# Altium PCB koosh_sd_card_base_v1_1.PcbDoc
Units mil, origin at the board's own origin, x right, y up, seen from the top; angles counter-clockwise.
Board outline 599.99 x 600 mil, 4 copper layers (Top Layer, PWR, GND, Bottom Layer 1), stack 23.778 mil thick; 21 components, 31 nets, 125 pads, 54 vias.
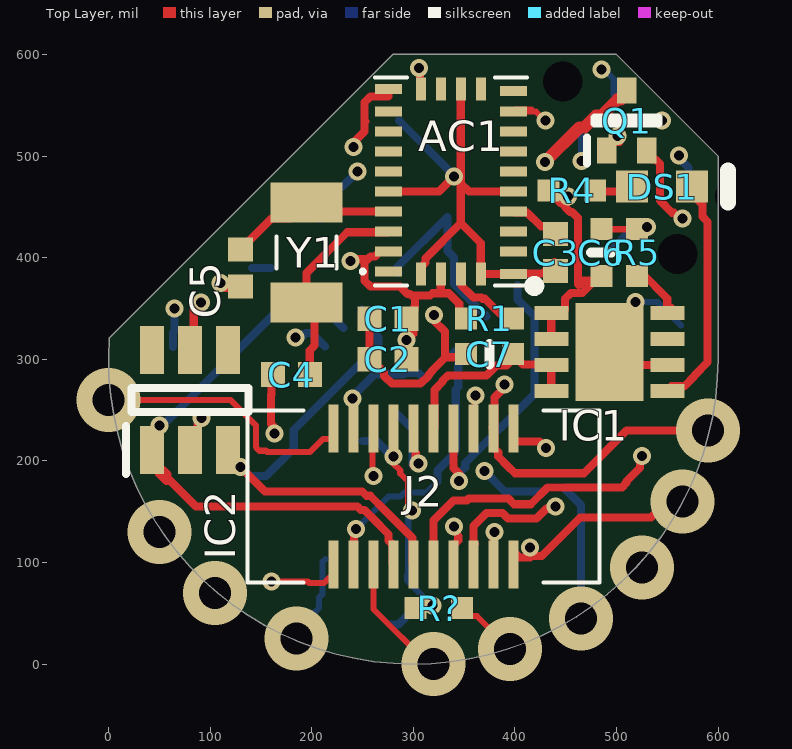
[diagram p0: Top Layer view]
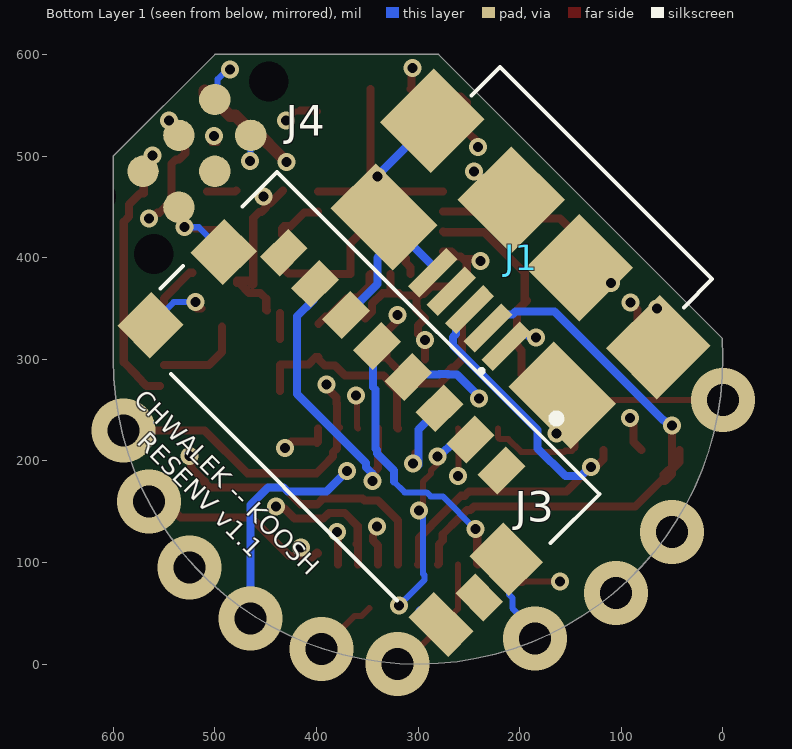
[diagram p1: Bottom Layer 1 view, seen from below]
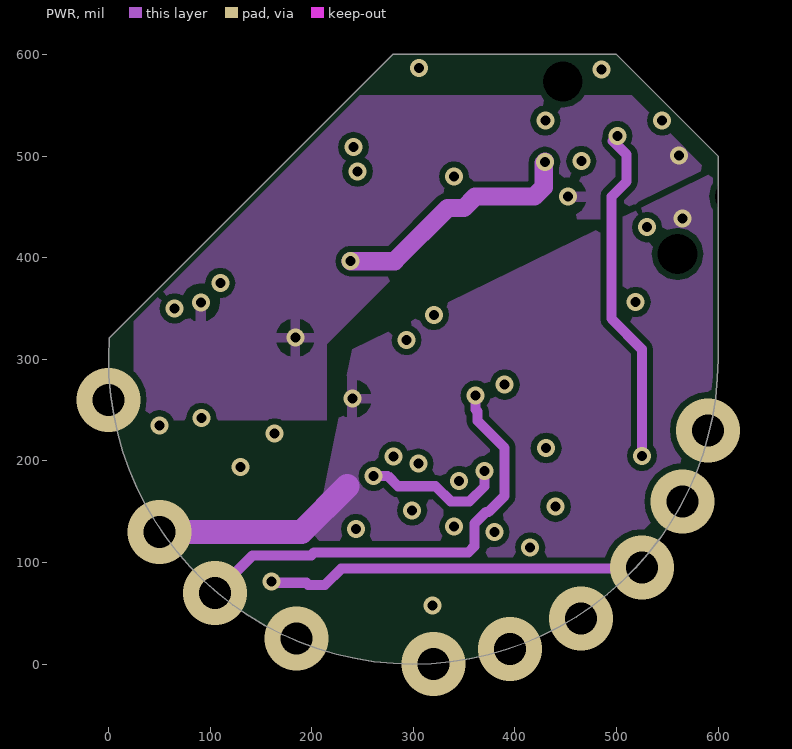
[diagram p2: PWR]
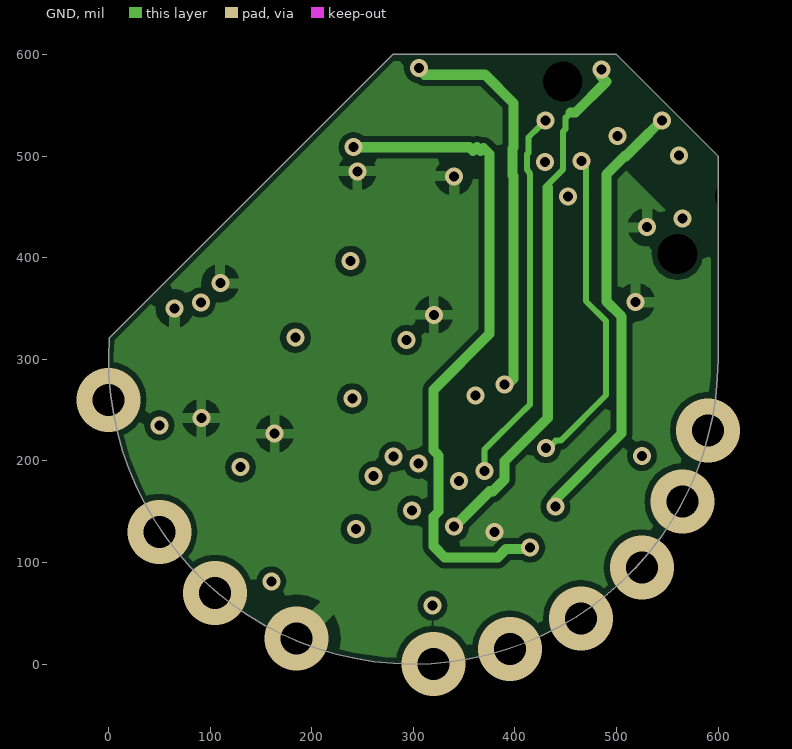
[diagram p3: GND]
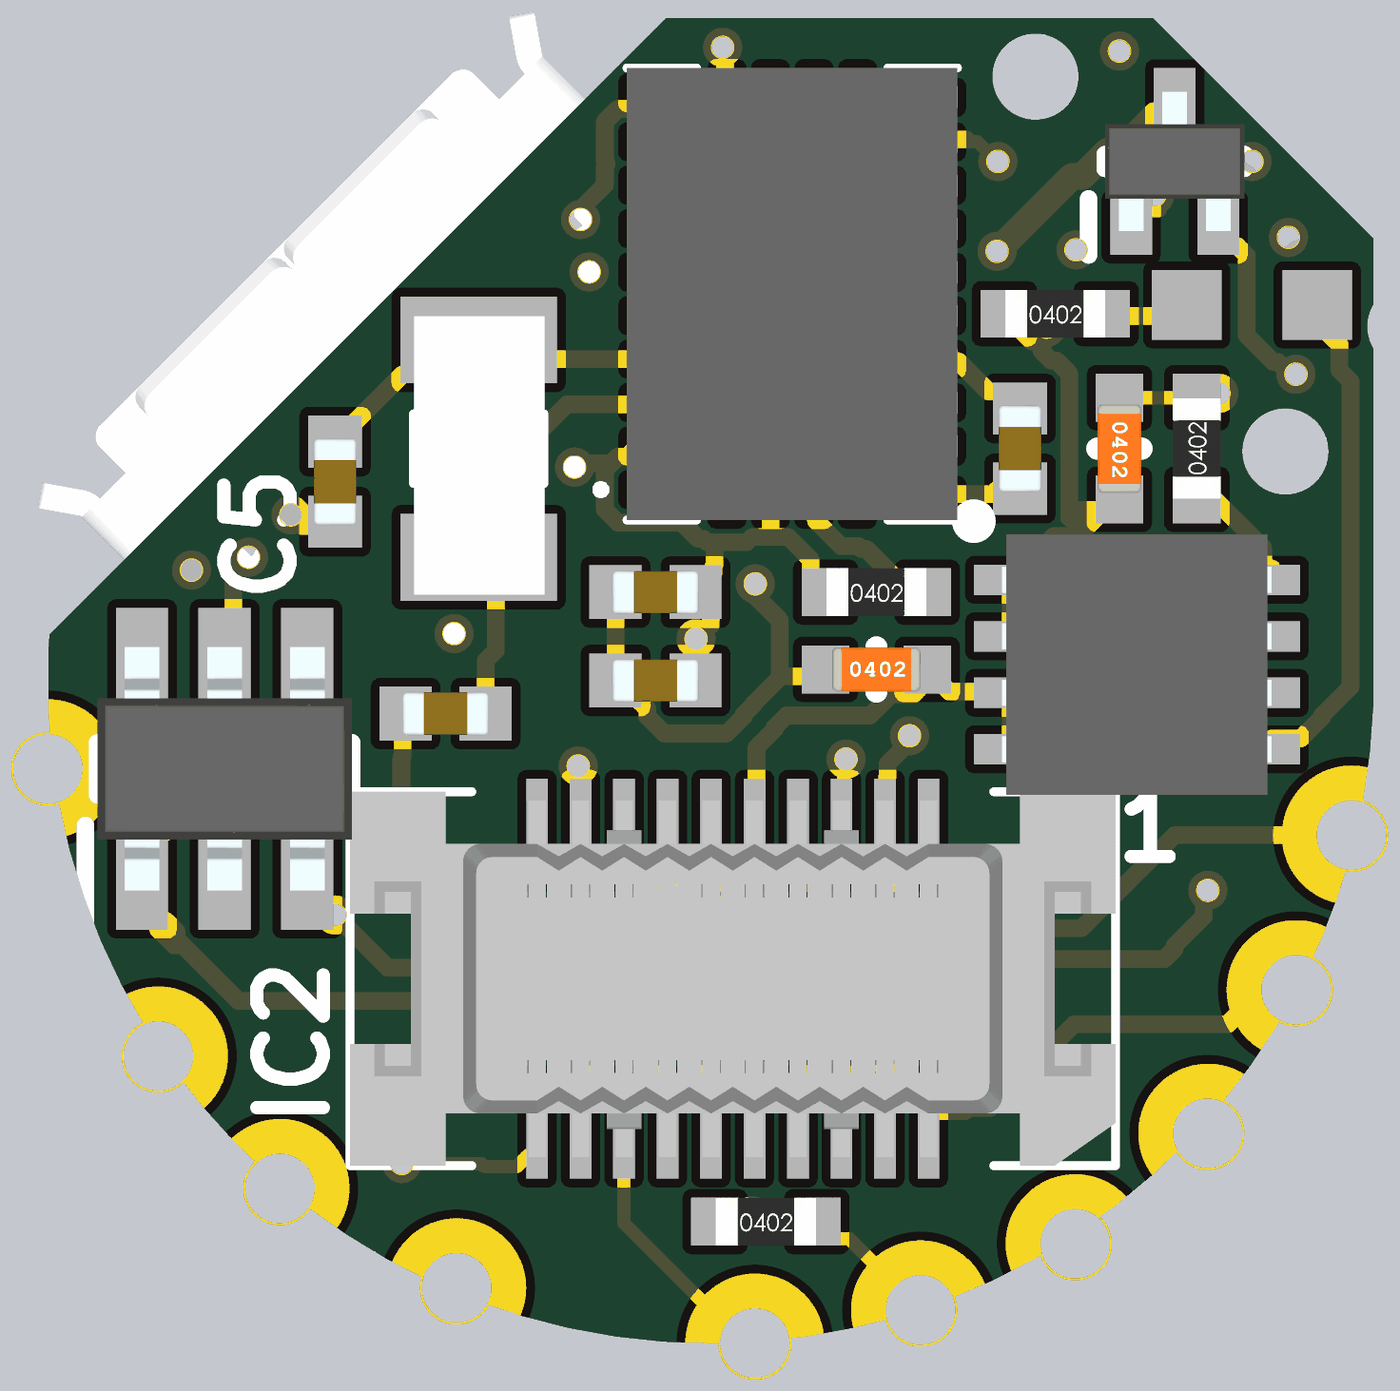
[diagram p4: 3D render of the assembled board from above, using the file's embedded part models]

## Layer stack, top to bottom
Top Solder: solder mask 0.394, Solder Resist, Dk 3.5
Top Layer: signal copper 1.417
Dielectric 2: prepreg 2.795, PP-006, Dk 4.1
PWR: signal copper 1.378
Dielectric 1: dielectric 12.598, FR-4, Dk 4.8
GND: signal copper 1.378
Dielectric 3: prepreg 2.795, PP-006, Dk 4.1
Bottom Layer 1: signal copper 1.417
Bottom Solder: solder mask 0.394, Solder Resist, Dk 3.5

## Board outline
0.73,320.93 ccw(c300,300) 600,300 600,500 500,600 279.8,600

## Design rules (kind name [scope] priority, off if disabled: settings)
BoardOutlineClearance [All] p1: gap=5 ignorepadtopadclearanceinfootprint=FALSE except(0: Arc-SplitContinuation Track-SplitContinuation SMDPad-SplitContinuation THPad-SplitContinuation Via-SplitContinuation Fill-SplitContinuation Poly-SplitContinuation Region-SplitContinuation Text-SplitContinuation)
Clearance [All] p1: gap=6 ignorepadtopadclearanceinfootprint=FALSE except(0: Arc-Hole Track-Hole SMDPad-Hole THPad-Hole Via-Hole Fill-Hole Poly-Hole Region-Hole Text-Hole)
PlaneConnect PWR [InNet('GND') or InNet('3.3V') or InNet('VBAT')] p1: planeconnectstyle=Relief reliefexpansion=20 reliefentries=4 reliefconductorwidth=10 reliefairgap=10
PlaneConnect [All] p2: planeconnectstyle=Relief reliefexpansion=20 reliefentries=4 reliefconductorwidth=10 reliefairgap=10
PolygonConnect [All] p1: connectstyle=Relief reliefconductorwidth=10 reliefentries=4 polygonreliefangle="90 Angle" airgapwidth=10
RoutingVias [All] p1: holewidth=9.84 width=17.72 viastyle="Through Hole" minholewidth=9.84 minwidth=17.72 maxholewidth=9.84 maxwidth=17.72
SolderMaskExpansion [All] p1: expansion=4 istentingtop=FALSE
Width [All] p1: maxlimit=10 minlimit=6 preferedwidth=10 toplayer_maxwidth=8 toplayer_prefwidth=6 midlayer1_minwidth=10 midlayer2_minwidth=10 bottomlayer_maxwidth=8 bottomlayer_prefwidth=6 minimp=50.000000 maximp=50.000000 favimp=50.000000
29 further rules are at their usual default settings.

## Components (designator, comment, footprint, x,y, rotation, side; value= is the part's Value field where it differs from the comment)
AC1 "BNO080" BNO080 330,475 r180 top
C1 "0.10µF" CAPC1005X55N 275,340 r180 top
C2 "0.10µF" CAPC1005X55N 275,300 r180 top
C3 "0.10µF" CAPC1005X55N 440,405 r270 top
C4 "15pF" CAPC1005X55N 180,285 r180 top
C5 "15pF" CAPC1005X55N 130,390 r270 top
C6 "4.7µF" SMD-0402C 485,405 r180 top
C7 "4.7µF" SMD-0402C 375,305 r270 top
DS1 "LTST-C190KFKT" LTST-C190KFKT_V 545,470 r0 top
IC1 "MCP73831T-2ACI_MC" SON65P300X300X100-9N-D 492.91,307.2 r0 top
IC2 "USBLC6-2SC6" SOT95P280X145-6N 80,260 r90 top
J1 "ZX62-B-5PA(33)" ZX62B5PA33 195,403.22 r45 bottom
J2 "0537480208" 0537480208 310,165 r180 top
J3 "0475710001" 0475710001 356,250 r225 bottom
J4 "TC2030-CTX-NL" TC2030MCPNL10 523.27,508.27 r315 bottom
Q1 "RE1C002ZPTL" SOTFL50P160X85-3N 510,535 r90 top
R1 "10k" SMD-0402-RES 375,340 r270 top
R4 "80.6k" SMD-0402-RES 455.95,466.05 r270 top
R5 "10k" SMD-0402-RES 520,405 r0 top
R? "0" SMD-0402-RES 325,55 r270 top
Y1 "FC-135_32.7680KA-A5" FC135327680KAAG0 195,405 r90 top

## Footprints (in the part's own frame and the unit in brackets; to place one, negate y for a bottom-side part, rotate by r counter-clockwise, add the part's x,y. Pads: shape width x height; smd on the part's side, far side on the other; paste and mask are expansions set on the pad)
0475710001 [mm]
  rect 0.7x1 smd: 1(3.55,1.415) 2(2.45,1.415) 3(1.35,1.415) 4(0.25,1.415) 5(-0.85,1.415) 6(-1.95,1.415) 7(-3.05,1.415) 8(-4.15,1.415)
  rect 1.15x1.2 smd: G1(-5.225,0.365) G2(-5.225,-2.225)
  rect 1.4x1.2 smd: G3(5.2,-0.075)
  rect 1x0.7 smd: G4(5.4,-1.225)
  rect 1.4x0.9 smd: G5(5.2,-2.375)
  silkscreen extent -5.7,-2.73 5.7,3.4, body extent -5.68,-2.53 5.72,2.92, height 2.28
0537480208 [mm]
  rect 0.25x1.2 smd: 1(-2.25,-1.7) 2(-2.25,1.7) 3(-1.75,-1.7) 4(-1.75,1.7) 5(-1.25,-1.7) 6(-1.25,1.7) 7(-0.75,-1.7) 8(-0.75,1.7) 9(-0.25,-1.7) 10(-0.25,1.7) 11(0.25,-1.7) 12(0.25,1.7) 13(0.75,-1.7) 14(0.75,1.7) 15(1.25,-1.7) 16(1.25,1.7) 17(1.75,-1.7) 18(1.75,1.7) 19(2.25,-1.7) 20(2.25,1.7)
  silkscreen extent -4.4,-2.15 4.4,2.15, body extent -4.4,-2.15 4.4,2.15, height 2.42
BNO080 [mm]
  rect 0.675x0.25 smd: 1(1.387,2.25) 6(-1.738,2.313) 7(-1.738,1.75) 8(-1.738,1.25) 9(-1.738,0.75) 10(-1.738,0.25) 11(-1.738,-0.25) 12(-1.738,-0.75) 13(-1.738,-1.25) 14(-1.738,-1.75) 15(-1.738,-2.263) 20(1.387,-2.313) 21(1.387,-1.75) 22(1.387,-1.25) 23(1.387,-0.75) 24(1.387,-0.25) 25(1.387,0.25) 26(1.387,0.75) 27(1.387,1.25) 28(1.387,1.75)
  rect 0.25x0.575 smd: 2(0.575,2.313) 3(0.075,2.313) 4(-0.425,2.313) 5(-0.925,2.313) 16(-0.925,-2.313) 17(-0.425,-2.313) 18(0.075,-2.313) 19(0.575,-2.313)
  silkscreen extent -2.07,-2.6 2.07,2.6, body extent -2.07,-2.6 1.73,2.6, height 1.28
CAPC1005X55N [mm]
  rect 0.6x0.62 smd: 1(-0.46,0) 2(0.46,0)
  body extent -0.5,-0.25 0.5,0.25, height 0.55
FC135327680KAAG0 [mm]
  rect 1x1.8 smd: 1(-1.25,0) 2(1.25,0)
  silkscreen extent -0.4,-0.75 0.4,0.75, body extent -1.68,-0.76 1.52,0.74, height 0.9
LTST-C190KFKT_V [mm] "SMD, 2-Leads, Body 1.6x0.8mm"
  rect 0.8x0.8 smd: 1(-0.75,0) 2(0.75,0)
  silkscreen extent 1.65,-0.4 1.65,0.4, body extent -0.8,-0.4 0.8,0.4, height 0.9
SMD-0402-RES [mm]
  rect 0.55x0.55 smd: 1(0,0.584) 2(0,-0.584)
  body extent -0.28,-0.57 0.27,0.58, height 0.41
SMD-0402C [mm]
  rect 0.55x0.55 smd: 1(0,0.584) 2(0,-0.584)
  silkscreen extent -0.25,0 0.25,0, body extent -0.25,-0.51 0.25,0.51, height 0.51
SON65P300X300X100-9N-D [mm]
  rect 0.85x0.35 smd: 1(-1.45,0.975) 2(-1.45,0.325) 3(-1.45,-0.325) 4(-1.45,-0.975) 5(1.45,-0.975) 6(1.45,-0.325) 7(1.45,0.325) 8(1.45,0.975)
  rect 1.7x2.45 smd: 9(0,0)
  silkscreen extent -2,1.53 -1.75,1.77, body extent -1.55,-1.5 1.55,1.5, height 1
SOT95P280X145-6N [mm]
  rect 1.2x0.6 smd: 1(-1.25,0.95) 2(-1.25,0) 3(-1.25,-0.95) 4(1.25,-0.95) 5(1.25,0) 6(1.25,0.95)
  silkscreen extent -1.85,-1.46 0.3,1.6, body extent -1.4,-1.46 1.4,1.46, height 1.45
SOTFL50P160X85-3N [mm]
  rect 0.645x0.48 smd: 1(-0.752,0.5) 2(-0.752,-0.5) 3(0.752,0)
  silkscreen extent -1.07,-0.8 0.08,0.99, body extent -0.8,-0.8 0.8,0.8, height 0.85
TC2030MCPNL10 [mm]
  round 0.787 smd: 1(-1.27,-0.434) 2(-1.27,0.836) 3(0,-0.434) 4(0,0.836) 5(1.27,-0.434) 6(1.27,0.836)
  round 0.495 hole 0.991 unplated: 7(-2.54,0.201) 8(2.54,1.217) 9(2.54,-0.815)
ZX62B5PA33 [mm]
  rect 0.4x1.35 smd: 1(-1.3,1.95) 2(-0.65,1.95) 3(0,1.95) 4(0.65,1.95) 5(1.3,1.95)
  rect 2.2x1.6 smd: 6(-3.15,1.825) 7(3.15,1.825)
  rect 1.8x1.9 smd: 8(-4,-0.725) 11(4,-0.725)
  rect 1.9x1.9 smd: 9(-1.2,-0.725) 10(1.2,-0.725)
  silkscreen extent -3.75,-2.88 3.75,2.87, body extent -4.04,-3.3 4.04,2.3, height 2.78

## Part data
AC1: "Accelerometer", Manufacturer_Name="Hillcrest Laboratories", Datasheet Link=http://www.hillcrestlabs.com/download/5a05f340566d07c196001ec1, Height=1.18mm, Manufacturer_Part_Number=BNO080
C1 C2 C3: library part GCM155R71C104KA55D, "CAP CER 0.1UF 16V X7R 0402", Digi-Key Part Number=490-4759-1-ND, Manufacturer="Murata Electronics North America", Operating Temperature="-55°C ~ 125°C", Package / Case="0402 (1005 Metric)", Ratings=AEC-Q200, Temperature Coefficient=X7R, Tolerance=±10%, Voltage=16V, @ qty=0, Applications=Automotive, Datasheets=http://www.murata.com/~/media/webrenewal/support/library/catalog/products/capacitor/mlcc/c03e.ashx, Factory Stock=0, Features=-, Height - Seated (Max)=-, Image=//media.digikey.com/Renders/Murata%20Renders/ZRB-SERIES-0402.jpg, Lead Spacing=-, Lead Style=-, Minimum Quantity=1, Mounting Type="Surface Mount, MLCC", Packaging="Cut Tape (CT)", Part Number=GCM155R71C104KA55D, Part Status=Active, Quantity Available=734194, Series=GCM, Size / Dimension="0.039\" L x 0.020\" W (1.00mm x 0.50mm)", Thickness (Max)="0.022\" (0.55mm)", Unit Price (USD)=0.1
C4 C5: library part GCM1555C1H150JA16D, "CAP CER 15PF 50V NP0 0402", Digi-Key Part Number=490-11147-1-ND, Manufacturer="Murata Electronics North America", Operating Temperature="-55°C ~ 125°C", Package / Case="0402 (1005 Metric)", Ratings=AEC-Q200, Temperature Coefficient="C0G, NP0", Tolerance=±5%, Voltage=50V, @ qty=0, Applications=Automotive, Datasheets=http://www.murata.com/~/media/webrenewal/support/library/catalog/products/capacitor/mlcc/c03e.ashx, Factory Stock=0, Features=-, Height - Seated (Max)=-, Image=//media.digikey.com/Renders/Murata%20Renders/ZRB-SERIES-0402.jpg, Lead Spacing=-, Lead Style=-, Minimum Quantity=1, Mounting Type="Surface Mount, MLCC", Packaging="Cut Tape (CT)", Part Number=GCM1555C1H150JA16D, Part Status=Active, Quantity Available=6185, Series=GCM, Size / Dimension="0.039\" L x 0.020\" W (1.00mm x 0.50mm)", Thickness (Max)="0.022\" (0.55mm)", Unit Price (USD)=0.1
C6 C7: library part GRM153R60G475ME15D, "CAP CER 4.7UF 4V X5R 0402", Digi-Key Part Number=490-13231-1-ND, Manufacturer="Murata Electronics North America", Operating Temperature="-55°C ~ 85°C", Package / Case="0402 (1005 Metric)", Ratings=-, Temperature Coefficient=X5R, Tolerance=±20%, Voltage=4V, @ qty=0, Applications="General Purpose", Datasheets=http://psearch.en.murata.com/capacitor/product/GRM153R60G475ME15%23.pdf, Factory Stock=0, Features=-, Height - Seated (Max)=-, Image=//media.digikey.com/Renders/Murata%20Renders/ZRB-SERIES-0402.jpg, Lead Spacing=-, Lead Style=-, Minimum Quantity=1, Mounting Type="Surface Mount, MLCC", Packaging="Cut Tape (CT)", Part Number=GRM153R60G475ME15D, Part Status=Active, Quantity Available=9100, Series=GRM, Size / Dimension="0.039\" L x 0.020\" W (1.00mm x 0.50mm)", Thickness (Max)="0.013\" (0.33mm)", Unit Price (USD)=0.27
DS1: library part CMP-1674-00008-1, "LED Uni-Color Orange, 75 mW, 30 mA, -35 to 85 degC, 2-Pin SMD, RoHS, Tape and Reel", Case Code (Imperial)=0603, Case Code (Metric)=1608, Max Operating Temperature="155 degC", Min Operating Temperature="-55 degC", Package Quantity=5000, Power Rating="100 mW", Resistance="47 kohm", Tolerance=1%, Voltage Rating="50 V", Case\Package=0603, ComponentLink1Description="Manufacturer URL", ComponentLink1URL=http://www.us.liteon.com/, ComponentLink2Description=Datasheet, ComponentLink2URL=http://optoelectronics.liteon.com/upload/download/DS-22-99-0186/S_110_LTST-C190KFKT.pdf, DatasheetVersion="Rev. I, 09/2011", Height="0.45 mm", Length="1.6 mm", Mount="Surface Mount", PackageDescription="2-Pin Surface Mount Device, Body 1.6 x 0.8 mm", PackageReference=C190KFKT, Packaging="Tape and Reel", Pins=2, REACH SVHC="No SVHC", RoHSCompliant=true, Voltage Rating (DC)="50 V", Width="0.8 mm"
IC1: "Integrated Circuit", Manufacturer_Name=Microchip, Manufacturer_Part_Number=MCP73831T-2ACI/MC, Mouser Part Number=579-MCP73831T-2ACIMC, Allied Price/Stock=https://www.alliedelec.com/microchiptechnologyinc-mcp73831t-2aci-mc/70452042/, Allied_Number=70452042, Datasheet Link=http://ww1.microchip.com/downloads/en/DeviceDoc/20001984g.pdf, Height=1mm, Mouser Price/Stock=https://www.mouser.com/Search/Refine.aspx?Keyword=579-MCP73831T-2ACIMC
IC2: "Integrated Circuit", Manufacturer_Name=STMicroelectronics, Mouser Part Number=511-USBLC6-2SC6, RS Part Number=9206266, Allied Price/Stock=http://www.alliedelec.com/stmicroelectronics-usblc6-2sc6/70389689/, Allied_Number=70389689, Datasheet Link=http://www.st.com/st-web-ui/static/active/en/resource/technical/document/datasheet/CD00050750.pdf, Height=1.45mm, Manufacturer_Part_Number=USBLC6-2SC6, Mouser Price/Stock=https://www.mouser.com/Search/Refine.aspx?Keyword=511-USBLC6-2SC6, RS Price/Stock=https://uk.rs-online.com/web/p/products/9206266
J1: "Connector", Manufacturer_Name=Hirose, Mouser Part Number=798-ZX62-B-5PA33, RS Part Number=1362267, Datasheet Link=http://www.mouser.com/ds/2/185/ZX_catalog-939768.pdf, Height=2.8mm, Manufacturer_Part_Number=ZX62-B-5PA(33), Mouser Price/Stock=https://www.mouser.com/Search/Refine.aspx?Keyword=798-ZX62-B-5PA33, RS Price/Stock=http://uk.rs-online.com/web/p/products/1362267
J2: "Connector", Manufacturer_Name=Molex, Datasheet Link=https://www.molex.com/pdm_docs/sd/537480208_sd.pdf, Height=2.6mm, Manufacturer_Part_Number=0537480208
J3: "Connector", Manufacturer_Name=Molex, Mouser Part Number=N/A, Datasheet Link=https://www.molex.com/pdm_docs/sd/475710001_sd.pdf, Height=2.3mm, Manufacturer_Part_Number=0475710001, Mouser Price/Stock=https://www.mouser.com/Search/Refine.aspx?Keyword=N%2FA
J4: "Connector", Manufacturer_Name="Tag Connect", Datasheet Link=http://www.tag-connect.com/Materials/TC2030-CTX.pdf, Height=18mm, Manufacturer_Part_Number=TC2030-CTX-NL
Q1: "MOSFET (P-Channel)", Manufacturer_Name="ROHM Semiconductor", Mouser Part Number=755-RE1C002ZPTL, RS Part Number=1486960P, Datasheet Link=https://componentsearchengine.com/Datasheets/1/RE1C002ZPTL.pdf, Height=0.85mm, Manufacturer_Part_Number=RE1C002ZPTL, Mouser Price/Stock=https://www.mouser.com/Search/Refine.aspx?Keyword=755-RE1C002ZPTL, RS Price/Stock=http://uk.rs-online.com/web/p/products/1486960P
R1 R5: library part ERJ-2GEJ103X, "RES SMD 10K OHM 5% 1/10W 0402", Digi-Key Part Number=P10KJCT-ND, Manufacturer="Panasonic Electronic Components", Operating Temperature="-55°C ~ 155°C", Package / Case="0402 (1005 Metric)", Power (Watts)="0.1W, 1/10W", Supplier Device Package=0402, Temperature Coefficient=±200ppm/°C, Tolerance=±5%, @ qty=1500, Composition="Thick Film", Datasheets=http://industrial.panasonic.com/www-cgi/jvcr13pz.cgi?E+PZ+3+AOA0001+ERJ2GEJ103X+7+WW, Factory Stock=0, Failure Rate=-, Features="Automotive AEC-Q200", Height - Seated (Max)="0.016\" (0.40mm)", Image=//media.digikey.com/Photos/Panasonic%20Photos/ERJ-PA2-Series.jpg, Minimum Quantity=1, Number of Terminations=2, Packaging="Cut Tape (CT)", Part Number=ERJ-2GEJ103X, Part Status=Active, Quantity Available=2560215, Series=ERJ, Size / Dimension="0.039\" L x 0.020\" W (1.00mm x 0.50mm)", Unit Price (USD)=0.00350
R4: library part ERJ-2RKF8062X, "RES SMD 80.6K OHM 1% 1/10W 0402", Digi-Key Part Number=P80.6KLCT-ND, Manufacturer="Panasonic Electronic Components", Operating Temperature="-55°C ~ 155°C", Package / Case="0402 (1005 Metric)", Power (Watts)="0.1W, 1/10W", Supplier Device Package=0402, Temperature Coefficient=±100ppm/°C, Tolerance=±1%, @ qty=1500, Composition="Thick Film", Datasheets=http://industrial.panasonic.com/www-cgi/jvcr13pz.cgi?E+PZ+3+AOA0002+ERJ2RKF8062X+7+WW, Factory Stock=0, Failure Rate=-, Features="Automotive AEC-Q200", Height - Seated (Max)="0.016\" (0.40mm)", Image=//media.digikey.com/Photos/Panasonic%20Photos/ERJ-PA2-Series.jpg, Minimum Quantity=1, Number of Terminations=2, Packaging="Cut Tape (CT)", Part Number=ERJ-2RKF8062X, Part Status=Active, Quantity Available=91747, Series=ERJ, Size / Dimension="0.039\" L x 0.020\" W (1.00mm x 0.50mm)", Unit Price (USD)=0.00496
R?: library part ERJ-2RKF1003X, "RES SMD 0 OHM 1% 1/10W 0402", Digi-Key Part Number=P100KLCT-ND, Manufacturer="Panasonic Electronic Components", Operating Temperature="-55°C ~ 155°C", Package / Case="0402 (1005 Metric)", Power (Watts)="0.1W, 1/10W", Supplier Device Package=0402, Temperature Coefficient=±100ppm/°C, Tolerance=±1%, @ qty=1500, Composition="Thick Film", Datasheets=http://industrial.panasonic.com/www-cgi/jvcr13pz.cgi?E+PZ+3+AOA0002+ERJ2RKF1003X+7+WW, Factory Stock=0, Failure Rate=-, Features="Automotive AEC-Q200", Height - Seated (Max)="0.016\" (0.40mm)", Image=//media.digikey.com/Photos/Panasonic%20Photos/ERJ-PA2-Series.jpg, Minimum Quantity=1, Number of Terminations=2, Packaging="Cut Tape (CT)", Part Number=ERJ-2RKF1003X, Part Status=Active, Quantity Available=2645965, Series=ERJ, Size / Dimension="0.039\" L x 0.020\" W (1.00mm x 0.50mm)", Unit Price (USD)=0.00496
Y1: library part FC-135_32.7680KA-A3, "Crystal or Oscillator", Manufacturer_Name="Epson Timing", Manufacturer_Part_Number="FC-135 32.7680KA-A5", Mouser Part Number=732-FC135-32.76KAA3, Datasheet Link=https://support.epson.biz/td/api/doc_check.php?dl=brief_fc-135r_en.pdf, Height=0mm, Mouser Price/Stock=https://www.mouser.com/Search/Refine.aspx?Keyword=732-FC135-32.76KAA3

## Via types
v1: diameter 17.72, hole 9.84, Top Layer to Bottom Layer 1, tented both sides, 44 vias
v2: diameter 62.99, hole 31.5, Top Layer to Bottom Layer 1, 10 vias

## Nets (pads, with @x,y where several pads share a name; then routed paths per layer and width w, separated by ;. In a path a pad name is that pad's centre, name@x,y a point inside that pad or via, vN(x,y) a via of type N, cw(c..) or ccw(c..) an arc to the next point about the centre after c; other vN are vias at no path point)
3.3V: J2.17 J3.4 Q1.2 | length 378.2
  Top Layer w8: Q1.2@529.09,505.99 529.09,502.74 535.13,496.7 538.38,496.7 542.64,492.44 542.64,456.25 554.64,444.25 556.66,444.25 562.25,438.67 v1(564.87,438.67)
  PWR w10: v1@237.42,260.64 238.08,261.3 v1(240.04,261.3)
  PWR w24: v2(50,130) 190,130 235,175
  Bottom Layer 1 w8: v1(240.04,261.3) 240.04,263.46 261.74,285.16 270.39,285.16 270.71,285.47 278.99,285.47 279.31,285.16 290.19,285.16 291.64,286.61 305,286.61 J3.4@310.62,280.98
3.3V_IMU: AC1.3 AC1.28 C1.1 C2.1 Q1.3 R1.2 | length 626.5
  Top Layer w8: v1(238.38,396.62) 240.16,398.41 255.04,398.41 ; AC1.28 267.03,406.1 262.26,401.34 257.96,401.34 255.04,398.41 ; C2.1 293.11,318.64 v1(293.36,318.9) ; 300,325 300,333.11 C1.1 293.11,340.39 301.32,348.6 301.32,351.95 301.71,352.34 301.71,362.62 ; AC1.3 327.05,364.95 ; R1.2 345.17,346.83 345.17,354.83 335.05,364.95 327.05,364.95 ; 255.04,398.41 252.11,395.48 252.11,377.35 257.96,371.5 287.01,371.5 294.36,364.15 296.77,364.15 298.3,362.62 301.71,362.62 ; 301.71,362.62 316.43,362.62 318.76,364.95 327.05,364.95
  Top Layer w12: v1(429.62,494.33) 463.54,528.24 468.24,528.24 479.8,539.8 485.2,539.8 501.3,555.91 504.55,555.91 510,561.36 Q1.3
  PWR w18: v1(238.38,396.62) 281.62,396.62 333.93,448.93 349.79,448.93 361,460.14 419.08,460.14 428.28,469.35 428.28,492.99 v1(429.62,494.33)
  Bottom Layer 1 w8: v1(238.38,396.62) v1@240,395
5V: C6.1 IC1.1 IC1.2 IC2.5 J1.1 J4.5 R4.2 | length 310.5
  Top Layer w8: IC2.5 83.86,313.07 83.86,348.86 v1(90.82,355.82) ; R4.2 445.57,453.43 ; IC1.2 IC1.1 ; IC1.1@448.75,347.9 449.45,348.6 449.45,359.58 455.31,365.43 466.28,365.43 476.02,375.17 478.17,375.17 478.17,377.33 467.05,377.33 462.91,373.19 ; v1(452.14,460) 450.28,458.14 450.28,449.89 449.7,449.3 454.08,444.92 456.35,444.92 462.2,439.06 462.2,373.89
  Bottom Layer 1 w8: v1(183.85,321.24) 185.71,323.1 191.53,323.1 194.39,325.97 199.87,325.97 J1.1 ; v1(561.5,500.61) 561.5,497.98 570.71,488.77 J4.5
BOOT0: J4.4
GND: AC1.2 AC1.5 AC1.6 AC1.10 AC1.17 AC1.25 C1.2 C2.2 C3.2 C4.2 C5.2 C6.2 C7.2 IC1.6 IC1.9 IC2.2 J1.5 J1.6 J1.7 J1.8 J1.9 J1.10 J1.11 J2.4 J3.6 J3.G1 J3.G2 J3.G3 J4.6 R5.1 | length 1532.6
  Top Layer w6: C6.2 R5.1
  Top Layer w8: IC2.2 87.81,218.6 87.81,235.97 91.36,239.51 v1(91.36,242.14) ; v1(110,375) 115,370 130,370 C5.2 ; C4.2 160.48,283.59 160.48,265.48 160,265 160,236.36 161.66,234.69 161.66,228.67 v1(163.52,226.81) ; C1.2 C2.2 256.89,299.61 264.7,291.8 266.61,291.8 271.3,287.11 271.3,283.65 278.95,276 307.27,276 314.92,283.65 314.92,284.72 319.56,289.36 319.56,289.71 331.85,302 ; AC1.25 325.16,465.16 v1(340,480) v1@345,485 ; AC1.2 307.36,390.33 312.13,395.1 312.13,399.4 346.73,434 ; v1(320.18,343.76) 320.18,338.37 331.17,327.37 331.17,302.67 331.85,302 ; AC1.17 346.73,473.27 ; C7.2@352,302 331.85,302 ; J2.4 378.82,98.15 378.82,128.82 v1(380,130) ; AC1.10 354.84,465.16 346.73,473.27 ; C3.2@438.92,395.81 427.41,384.3 398.79,384.3 AC1.6 AC1.5 366.42,414.32 346.73,434 ; IC1.9@492.91,332.09 IC1.9 505.71,294.41 IC1.6 ; IC1.9@513.43,350 517.48,350 518.91,351.43 v1(518.91,356.32) ; 346.73,434 346.73,473.27
  Bottom Layer 1 w6: v2@185,35.66 187.58,35.66 207.11,55.19 207.11,65.12 210.54,68.55 210.54,100.37 J3.G3 ; J3.G1 515.68,430 v1(530,430) ; v1(518.91,356.32) 540.6,356.32 J3.G2
  Bottom Layer 1 w8: J1.8 63.46,326.54 65,328.08 v1(65,350) ; J1.9 J1.9@160,390 ; J1.10@208.22,438.22 J1.10 216.81,456.81 v1(245,485) ; J1.5 284.74,385.87 284.74,391.35 J1.7 333.5,406.5 340,400 340,374.1 J3.6@371.87,342.23 ; J1.11 340,480.93 v1(340,480)
  other v2: 185,25
I2C1_SCL: AC1.19 J2.3 | length 712.3
  Top Layer w8: v1(305.39,586.67) 306.44,585.62 306.44,566.98 AC1.19 ; v1(390,275) 390,272.37 380.09,262.46 380.09,256.59 379.82,256.31 379.82,234.49 378.08,232.75 379.82,231.01 379.82,212.31 383.66,208.46 383.66,204.16 392.8,195.02 399.98,187.86 453.61,187.86 467.86,187.86 510,230 v2@579.23,230
  PWR w10: v1@388.52,273.52 v1(390,275)
  GND w10: v1(305.39,586.67) 305.39,585.86 311.25,580 370.7,580 398.6,552.1 398.6,508.36 397.76,507.52 397.76,481.13 398.6,480.29 398.6,280.86 396.6,278.86 395.95,278.86 392.09,275 v1(390,275)
  other v2: 590,230
I2C1_SDA: AC1.20 J2.2 | length 930.1
  Top Layer w8: v1(241.1,508.72) v1@245.74,508.72 ; v1@241.1,513.36 252.11,524.37 252.11,533.28 252.89,534.06 252.11,534.83 252.11,552.96 257.96,558.82 275.39,558.82 AC1.20 ; J2.2@398.58,109.08 399.5,110 404.5,105 415,105 v1@416.48,106.48 ; v1(415,114.86) 416.48,113.38 v1@416.48,106.48 ; v2@553.35,160 549.58,160 533.88,144.31 464.31,144.31 426.48,106.48 v1@416.48,106.48
  GND w10: v1(241.1,508.72) 355.15,508.72 358.86,505 362.58,508.72 366.3,505 369.14,507.85 375,501.99 375,325 320,270 320,210.3 324.86,205.44 324.86,150.14 320,145.28 320,115.86 330.86,105 383.08,105 391.47,113.38 413.52,113.38 v1(415,114.86)
  other v2: 565,160
IMU_CLK_IN: AC1.27 C4.1 Y1.1 | length 205.3
  Top Layer w8: Y1.1@192.79,357.79 202.71,347.86 202.71,313.43 198.11,308.83 C4.1 ; Y1.1 195,385 235,425 274.61,425 AC1.27
IMU_CLK_OUT: AC1.26 C5.1 Y1.2 | length 179.1
  Top Layer w8: C5.1 130.39,408.11 138.2,415.92 138.2,416.31 160.42,438.53 179.31,438.53 Y1.2@186.26,445.47 ; Y1.2@180.66,445.47 Y1.2@186.26,445.47 ; Y1.2 Y1.2@186.26,445.47 ; AC1.26 Y1.2@186.26,445.47
IMU_EN: J2.10 Q1.1 | length 641.8
  Top Layer w6: v1(500.98,519.73) 500.98,516.5 497.24,512.76 v1@503.28,512.76
  Top Layer w8: J2.10 319.84,141.51 339.47,161.14 352.81,161.14 354.53,162.86 393.61,162.86 399.16,157.31 415.64,157.31 432.19,173.86 505.31,173.86 510,178.54 510,180 523.25,193.25 523.25,203.25 v1(525,205)
  PWR w10: v1(500.98,519.73) 496.26,515 510,501.26 510,475 495,460 495,340 525,310 v1(525,205)
IMU_INT: AC1.14 J2.15 | length 824.3
  Top Layer w6: J2.15 260,231.14 260,186.14 v1(260.92,185.23) ; 416.18,545.82 400.35,545.82 AC1.14 420.71,543.9 429.61,535 v1(430,535)
  PWR w10: v1(260.92,185.23) 274.77,185.23 285,175 321.92,175 336.77,160.14 355.29,160.14 370,174.85 v1(370,190)
  GND w6: v1(370,190) 370,211.02 408.98,250 409.23,250 415,255.77 415,482.74 413.28,484.46 413.28,485.41 411.76,486.93 411.76,501.72 413.28,503.24 413.28,518.3 425,530.01 v1@425,538.38
  Bottom Layer 1 w8: v1(370,190) 390,170 428.28,170 432.14,173.86 447.81,173.86 465,156.67 465,60.37 v2@464.93,60.3
  other v2: 465,45
LH_EN: R?.1 | length 58.4
  Top Layer w6: R?.1 355.69,47.31 362.69,47.31 382.54,27.46 v2@395,27.46
  other v2: 395,15
LH_HP_OUT: J2.20 | length 433
  Top Layer w6: v1(160.2,81.31) 196.17,81.31 197.48,80 212.27,80 J2.20@217.34,85.07
  PWR w10: v1(160.2,81.31) 161.51,80 194.65,80 196.65,78 213.1,78 229.1,94 500.52,94 501.52,95 v2(525,95)
MIC_EN: J2.16 | length 125.5
  Top Layer w6: J2.16 260.79,54.21 315,0 v2(320,0)
MIC_ENV: J2.5 | length 483
  Top Layer w6: J2.5 360.22,232.94 360.22,263.39 v1(361.24,264.4)
  PWR w10: v2(105,70) 142,107 199.53,107 202.53,110 354.28,110 360.14,115.86 360.14,138.23 371.77,149.86 374.14,149.86 389.86,165.57 389.86,212.72 363.34,239.23 363.34,248.35 361.24,250.46 v1(361.24,264.4)
  Bottom Layer 1 w6: v1@360,265 360.63,265 v1(361.24,264.4)
NetAC1_4: AC1.4 R1.1 | length 77.8
  Top Layer w8: AC1.4 347.65,383.02 347.65,372.32 357.35,362.62 359.15,360.83 366.97,360.83 368.22,359.58 370.42,359.58 388.17,341.83 391.17,341.83 R1.1@398,335
NetAC1_9: AC1.9 C3.1 | length 48.7
  Top Layer w8: AC1.9 399.35,444.55 412.01,444.55 425.64,430.92 431.8,430.92 433.99,428.73 C3.1@433.99,422.57
NetDS1_1: DS1.1 R4.1 | length 29.4
  Top Layer w8: R4.1 480,465 DS1.1@507.88,465
NetDS1_2: DS1.2 IC1.5 | length 233.2
  Top Layer w8: IC1.5@554.17,273.82 567.17,273.82 576.73,283.38 576.73,284.2 589.61,297.08 589.61,435.39 584.56,440.44 584.56,452.2 573.52,463.25 570,463.25 DS1.2@570,474.53
NetIC1_8: IC1.8 R5.2 | length 50.5
  Top Layer w8: R5.2@521.83,385.17 524.83,385.17 550,360 550,353.48 552.89,350.59 IC1.8@554.17,350.59
NRST: J2.1 J4.2 | length 395.6
  Top Layer w8: J2.1 398.58,218.79 399.5,217.87 400.56,218.92 424.49,218.92 v1(430.75,212.66)
  GND w6: v1(430.75,212.66) 432.83,212.66 440.17,220 445,220 489.86,264.86 489.86,337.49 470,357.35 470,490.34 v1(465.34,495)
  Bottom Layer 1 w6: J4.2 464.99,520.01 464.99,495.94 v1@465.93,495
SD_CS: J2.13 J3.2 R?.2 | length 195.4
  Top Layer w6: v1(280.64,204.2) 280.64,200.64 280,200 280,197.77 287.14,190.63 287.14,187.6 295,179.74 295,155 v1(298.93,151.07)
  Bottom Layer 1 w6: v1@295,143.97 295,88.95 293.74,87.69 293.74,82.72 v1(318.88,57.58)
  Bottom Layer 1 w8: J3.2@250.26,219.74 263.68,219.74 279.22,204.2 v1(280.64,204.2)
SPI1_MISO: J2.7 J3.7 | length 285.4
  Top Layer w8: J2.7 339.53,193.1 345.91,186.72 345,185.8 v1(345,180)
  Bottom Layer 1 w8: v1(345,180) 345,187.63 346.72,189.35 351.14,193.77 351.14,197.81 419.12,265.79 419.12,342.39 402.49,359.02 J3.7@402.49,372.85
SPI1_MOSI: J2.11 J3.3 | length 82.3
  Top Layer w8: v1@300.14,195.46 302.38,197.69 302.38,207.62
  Bottom Layer 1 w8: J3.3@280,250.36 299.5,230.86 299.5,196.1 300.6,195 302.82,197.22 v1(305,197.22)
SPI1_SCK: J2.18 J3.5 | length 275.7
  Top Layer w8: J2.18 241.75,98.72 241.75,135.11 243.58,133.28 v1(243.58,132.89)
  Bottom Layer 1 w6: v1(243.58,132.89) 275.69,165 287.6,165 291.53,168.93 313.06,168.93 323.86,179.73
  Bottom Layer 1 w8: 323.86,179.73 323.86,190.53 340.57,207.24 340.57,210.73 341.84,212.01 341.84,270.22 ; J3.5@341.25,307.92 339.84,306.51 344.45,301.9 344.45,295.05 344.29,294.89 344.29,272.67
SYS_SWCLK: J2.8 J4.1 | length 585.2
  Top Layer w8: J2.8 339.53,116.77 344.29,121.54 344.29,125.84
  GND w6: 432.28,468.9 432.28,471.73 447.48,486.93 447.48,501.72 447.48,524.4 449.86,526.77 449.86,537.71 455.03,542.88
  GND w10: v1(340.28,135.28) 375.14,170.14 378.23,170.14 389.86,181.77 389.86,199.86 432.28,242.28 432.28,468.9 ; 455.03,542.88 459.6,542.88 490,573.28 485,578.28 v1(485,585)
  Bottom Layer 1 w6: v1(485,585) 487.91,585 497.28,575.63 497.28,558.43 J4.1
SYS_SWDIO: J2.6 J4.3 | length 569.1
  Top Layer w8: J2.6 359.21,116.77 360.57,118.13 359.4,119.3 359.4,127.74 359.41,136.08 372.19,148.86 387.81,148.86 393.36,143.31 421.44,143.31 431.27,153.14 438.14,153.14 v1(440,155)
  GND w10: v1(440,155) 440,161.92 505,226.92 505,342.14 503.86,343.29 490,357.14 490,481.92 507.95,499.87 509.21,499.87 520.84,511.5 544.34,535 v1(545,535)
TP_INT: J2.19 | length 255.1
  Top Layer w6: v2@14.55,260 120,260 145,235 145,213.51 148.51,210 155.08,210 156.13,208.95 198.44,208.95 211.01,221.52 219.5,221.52 221.42,223.44 J2.19
  other v2: 0,260
USB_DN: IC2.1 J1.2 J2.14 | length 604.3
  Top Layer w8: IC2.1 42.6,198.98 50.41,191.17 53.5,191.17 58.19,186.48 58.19,183.02 61.12,180.09 ; v1(50,235) 50,191.17 50,187.23 57.14,180.09 61.12,180.09 ; J2.14 279.55,98.99 279.55,117.69 275.71,121.54 275.71,127.82 259.79,143.74 251.79,151.74 248.25,151.74 244.99,155 86.21,155 61.12,180.09
  Bottom Layer 1 w8: v1(50,235) 52.63,235 57.49,239.86 58.3,239.86 165.55,347.11 204.01,347.11 207.05,344.07 217.97,344.07 J1.2
USB_DP: IC2.3 J1.3 J2.12 | length 494.6
  Top Layer w8: IC2.3 117.4,201.67 125.21,193.86 v1(130,193.86) 153.86,170 249.79,170 254.05,165.74 257.59,165.74 273.79,149.54 299.24,124.09 299.24,98.99 J2.12
  Bottom Layer 1 w8: v1(130,193.86) 130.69,193.86 139.54,185 155,185 182.38,212.38 182.38,230.31 265.55,313.48 265.55,321.76 262.51,324.8 262.51,335.71 J1.3
VBAT: C7.1 IC1.3 IC1.4 J2.9 | length 195.1
  Top Layer w8: J2.9 320.76,232.85 320.76,269.7 328.92,277.85 328.92,278.92 334.17,284.17 372.09,284.17 381.77,293.86 391.86,293.86 C7.1@398,300 ; C7.1@398,302 401,302 408,295 435.24,295 IC1.3 IC1.4
pads on no net: AC1.1 AC1.7 AC1.8 AC1.11 AC1.12 AC1.13 AC1.15 AC1.16 AC1.18 AC1.21 AC1.22 AC1.23 AC1.24 IC1.7 IC2.4 IC2.6 J1.4 J3.1 J3.8 J3.G4 J3.G5 J4.7 J4.8 J4.9
copper on no net: | length 26.9
  Bottom Layer 1 w8: 277.36,39.12 285.37,39.12 298.72,52.48

## Polygon pours and split planes (outlines as drawn)
3.3V on PWR "3.3V_L02_P004" (solid, remove dead copper, pour order 4): 240,310 179.14,6.03 465.26,70.26 605,210 605,488.57
5V on PWR "5V_L02_P006" (solid, pour order 6): 215,240 25,240 25,405 180,560 515,560 637.2,437.8 337.8,437.8 215,315
5V on PWR "5V_L02_P007" (solid, pour order 7): 45,70
GND on GND "Top Layer-GND 1" (solid, remove dead copper, pour order 2): 592.56,299.72 cw(c298.78,299.72) 298.78,593.5 401.5,593.5 592.56,402.44

## Silkscreen, mask and mechanical layers (free items; w line width, h text height)
Bottom Overlay:
  text "CHWALEK -- KOOSH  /     RESENV v1.1" at 600,240 h18 r45
Mechanical Board Shape:
  lines w5: 0.73,320.93 ccw(c300,300) 600,300 600,500 500,600 280,600 279.8,600 0.73,320.93